# EAGLE board transmiter switch (EAGLE 6.1)
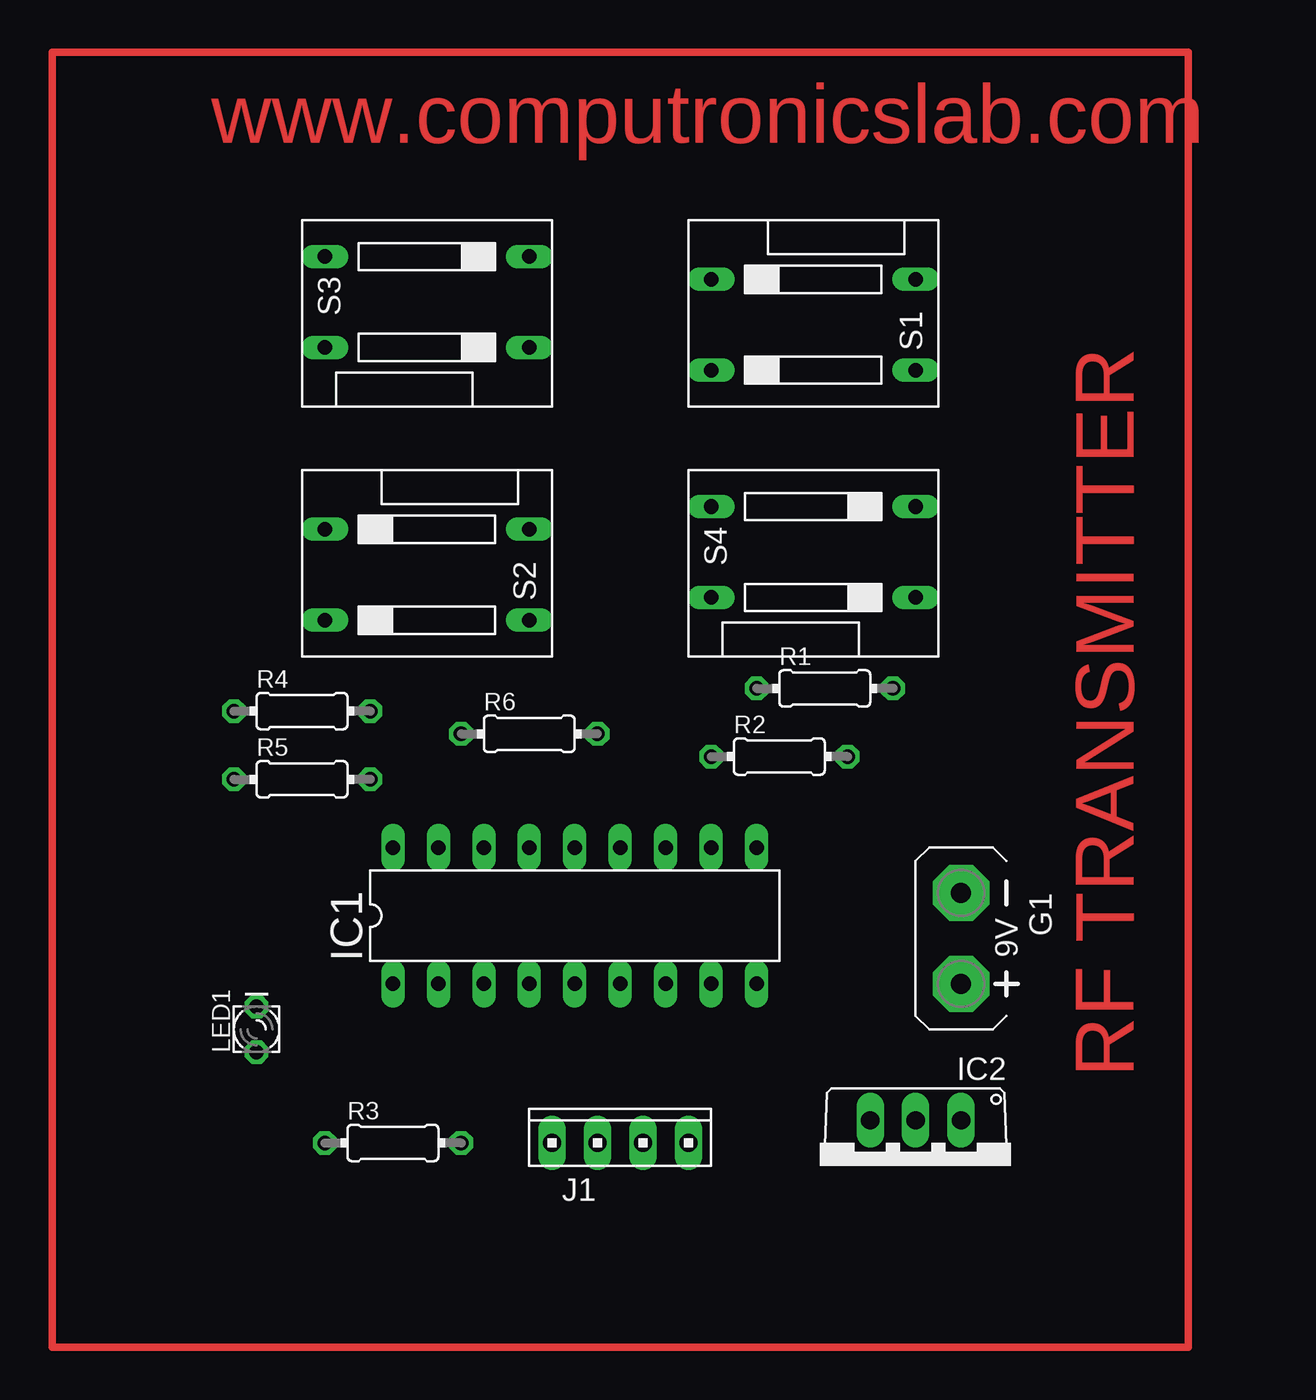
[diagram p0: board, top side]
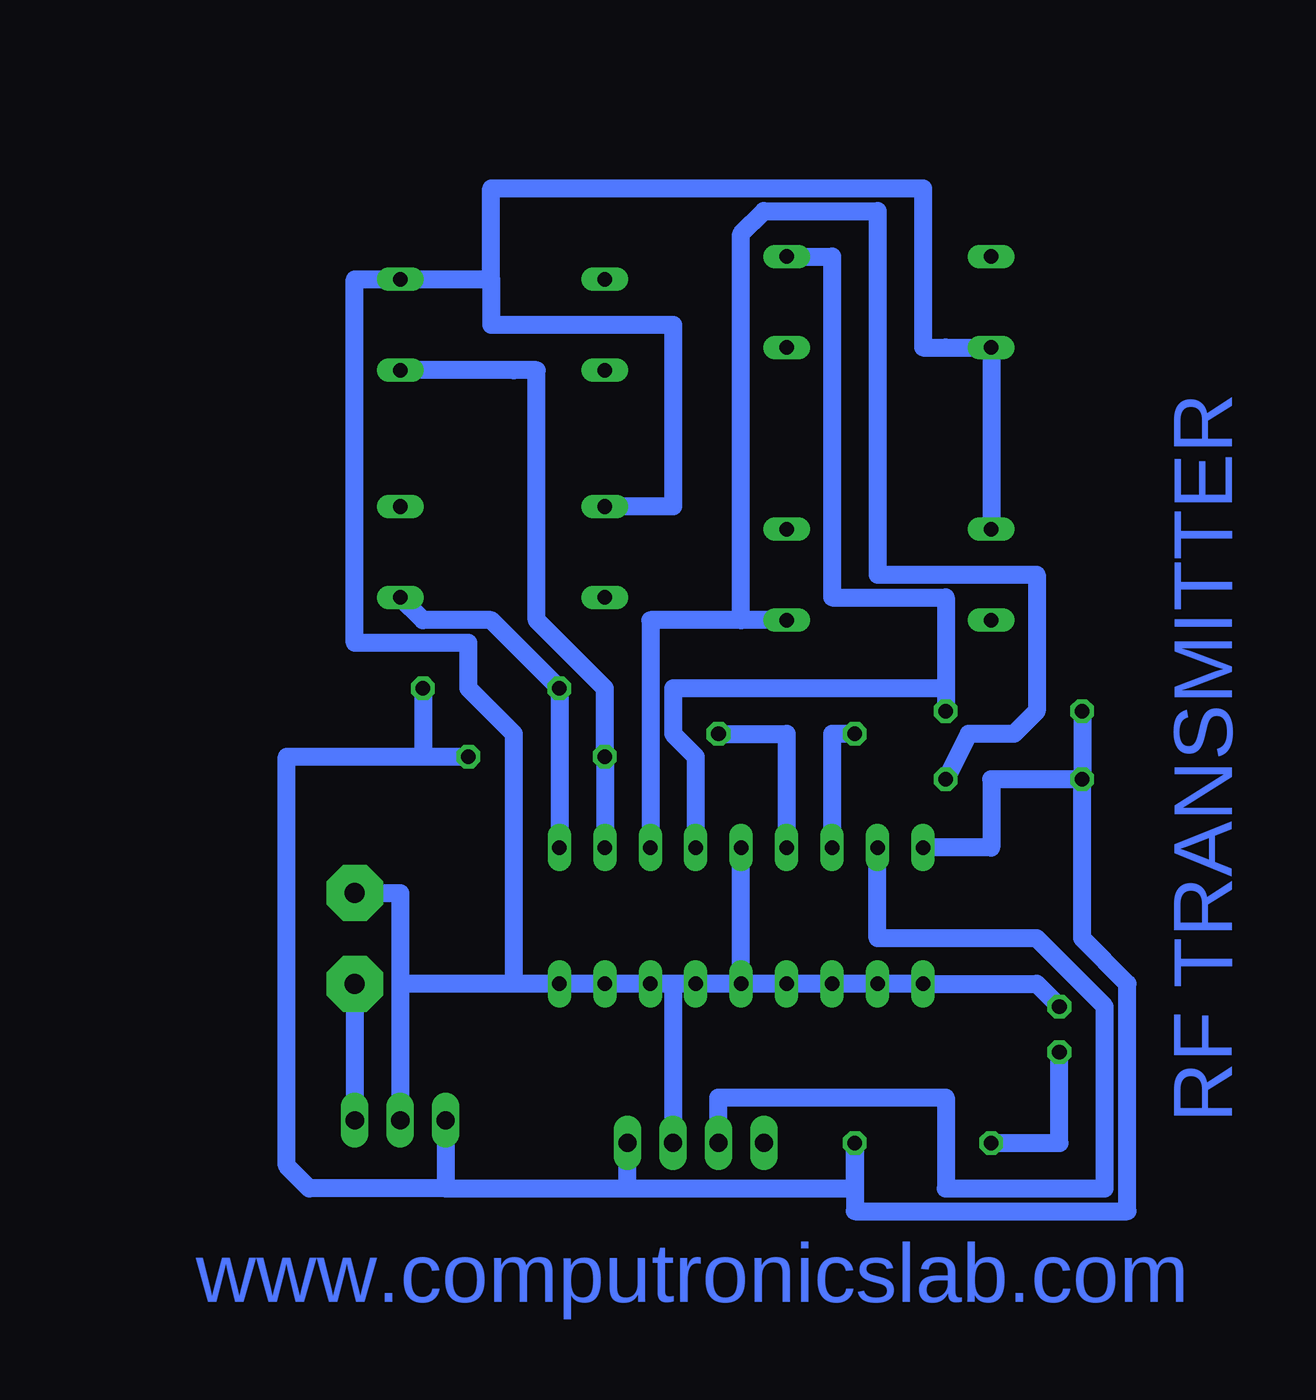
[diagram p1: board, bottom side, seen from below]

No outline drawn. Coordinates in mm, seen from the top.
Copper layers (1*16): Top 0.035mm / dielectric 1.5mm / Bottom 0.035mm
Design rules: minimum track width 40mil, minimum drill 24mil, track to track 8mil, track to pad 8mil, pad to pad 8mil, via to via 8mil, smd to smd 8mil, copper to edge 40mil, drill to drill 8mil, minimum pad ring 10mil, minimum via ring 8mil, stop-mask expansion 4mil, vias tented up to drill 0mil, thermal gap 10mil

## Footprints (pad centres in the part's own frame; a part is rotated, then mirrored left to right if it is on the bottom)
AB9V = drill 1.118 pad 3.15 octagon: + 0,2.54; - 0,-2.54
DIL18 = drill 0.813 long: 1 -10.16,-3.81; 2 -7.62,-3.81; 3 -5.08,-3.81; 4 -2.54,-3.81; 5 0,-3.81; 6 2.54,-3.81; 7 5.08,-3.81; 8 7.62,-3.81; 9 10.16,-3.81; 10 10.16,3.81; 11 7.62,3.81; 12 5.08,3.81; 13 2.54,3.81; 14 0,3.81; 15 -2.54,3.81; 16 -5.08,3.81; 17 -7.62,3.81; 18 -10.16,3.81
TO220V = drill 1.016 long: 1 -2.54,-2.54; 2 0,-2.54; 3 2.54,-2.54
10X04MTA = drill 1.016 long: 1 3.81,0; 2 1.27,0; 3 -1.27,0; 4 -3.81,0
LED_LD260 = drill 0.813 octagon: A -1.27,0; K 1.27,0
0204/7 = drill 0.813 octagon: 1 -3.81,0; 2 3.81,0
DS-02 = drill 0.813 long: 1 -5.08,-5.08; 2 0,-5.08; 3 0,6.35; 4 -5.08,6.35

## Placement (x,y rotation side)
G1  AB9V  [AB9V]  69.85,40.64 180 top
IC1  HT12E  [DIL18]  48.26,41.91 0 top
IC2  7805TV  [TO220V]  67.31,27.94 180 top
J1  transmitter  [10X04MTA]  50.8,29.21 0 top
LED1  5mm  [LED_LD260]  30.48,35.56 90 top
R1  1k  [0204/7]  62.23,54.61 0 top
R2  1k  [0204/7]  59.69,50.8 0 top
R3  330E  [0204/7]  38.1,29.21 0 top
R4  1k  [0204/7]  33.02,53.34 0 top
R5  1k  [0204/7]  33.02,49.53 0 top
R6  1ME  [0204/7]  45.72,52.07 0 top
S1  push switch 1  [DS-02]  60.96,72.39 270 top
S2  push switch2  [DS-02]  39.37,58.42 270 top
S3  push switch 3  [DS-02]  40.64,78.74 90 top
S4  push switch 4  [DS-02]  62.23,64.77 90 top

## Library data of the parts
G1 = battery
IC1 = microchip
IC2 = linear
J1 = con-amp
LED1 = eagle-ltspice; SPICEMODEL: NONE; SPICEPREFIX: D; SPICETYPE: diode
R1-R6 = eagle-ltspice; SPICEMODEL: NONE; SPICEPREFIX: R
S1-S4 = switch-dil; OC_FARNELL: 9472126; OC_NEWARK: unknown

## Nets
N$1: LED1.A R3.1
N$2: IC1.10 R1.1 S4.1
N$3: IC1.11 R2.1 S1.3
N$4: IC1.12 R5.2 S2.3
N$5: IC1.13 R4.2 S3.2
N$6: IC1.16 R6.1
N$7: IC1.15 R6.2
N$8: IC1.18 IC2.3 J1.1 R1.2 R2.2 R3.2 R4.1 R5.1
N$9: IC1.17 J1.3
N$10: G1.- IC1.1 IC1.2 IC1.3 IC1.4 IC1.5 IC1.6 IC1.7 IC1.8 IC1.9 IC1.14 IC2.2 J1.2 LED1.K S1.4 S2.1 S3.4 S4.3
N$11: G1.+ IC2.1

## Tracks (layer width: path | path; a pad name or v marks a point on that pad's centre or on a via)
N$1
  Bottom 1.016: LED1.A 30.48,29.21 R3.1
N$2
  Bottom 1.016: IC1.10 R1.1 62.23,58.42 66.04,58.42 S4.1
N$3
  Bottom 1.016: IC1.11 R2.1 55.88,54.61 58.42,57.15 59.69,58.42 59.69,72.39 60.96,72.39 S1.3
N$4
  Bottom 1.016: R5.2 35.56,52.07 33.02,52.07 31.75,53.34 31.75,60.96 40.64,60.96 40.64,81.28 46.99,81.28 48.26,80.01 48.26,58.42 | S2.3 48.26,58.42 | IC1.12 53.34,58.42 48.26,58.42
N$5
  Bottom 1.016: 36.83,54.61 36.83,59.69 43.18,59.69 43.18,66.04 43.18,78.74 S3.2 | 36.83,54.61 R4.2 | IC1.13 50.8,50.8 52.07,52.07 52.07,54.61 36.83,54.61
N$6
  Bottom 1.016: IC1.16 43.18,52.07 R6.1
N$7
  Bottom 1.016: IC1.15 45.72,52.07 R6.2
N$8
  Bottom 1.016: R4.1 R5.1 | IC1.18 34.29,45.72 34.29,49.53 R5.1 | R1.2 66.04,50.8 | 66.04,50.8 R2.2 | 64.77,26.67 54.61,26.67 | 54.61,26.67 41.91,26.67 R3.2 41.91,25.4 26.67,25.4 26.67,38.1 29.21,40.64 R5.1 | IC2.3 64.77,26.67 | 54.61,26.67 J1.1 | 66.04,50.8 73.66,50.8 73.66,27.94 72.39,26.67 64.77,26.67
N$9
  Bottom 1.016: IC1.17 40.64,40.64 31.75,40.64 27.94,36.83 27.94,26.67 36.83,26.67 36.83,31.75 41.91,31.75 48.26,31.75 49.53,31.75 49.53,30.48 J1.3
N$10
  Bottom 1.016: S2.1 S3.4 36.83,73.66 38.1,73.66 38.1,82.55 62.23,82.55 62.23,77.47 | 62.23,77.47 S1.4 69.85,77.47 69.85,57.15 63.5,57.15 63.5,54.61 60.96,52.07 60.96,38.1 | 62.23,77.47 62.23,74.93 52.07,74.93 52.07,64.77 S4.3 | 67.31,38.1 67.31,43.18 G1.- | 67.31,38.1 IC2.2 | LED1.K 31.75,38.1 IC1.1 IC1.2 IC1.3 IC1.4 IC1.5 | IC1.5 IC1.6 52.07,38.1 | 52.07,38.1 IC1.7 IC1.8 IC1.9 60.96,38.1 | IC1.5 IC1.14 | 52.07,38.1 J1.2 | 60.96,38.1 67.31,38.1
N$11
  Bottom 1.016: G1.+ IC2.1
N$12
  Top 0.406: 19.05,90.17 19.05,17.78 82.55,17.78 82.55,90.17 19.05,90.17

## Text on the board
Top: www.computronicslab.com | RF TRANSMITTER
Bottom: RF TRANSMITTER | www.computronicslab.com